# Altium PCB top.PcbDoc
Units mm, origin at the board's own origin, x right, y up, seen from the top; angles counter-clockwise.
Board outline 90.31 x 81.89 mm, 2 copper layers (Top Layer, Bottom Layer); 16 components, 7 nets, 117 pads, 6 vias.
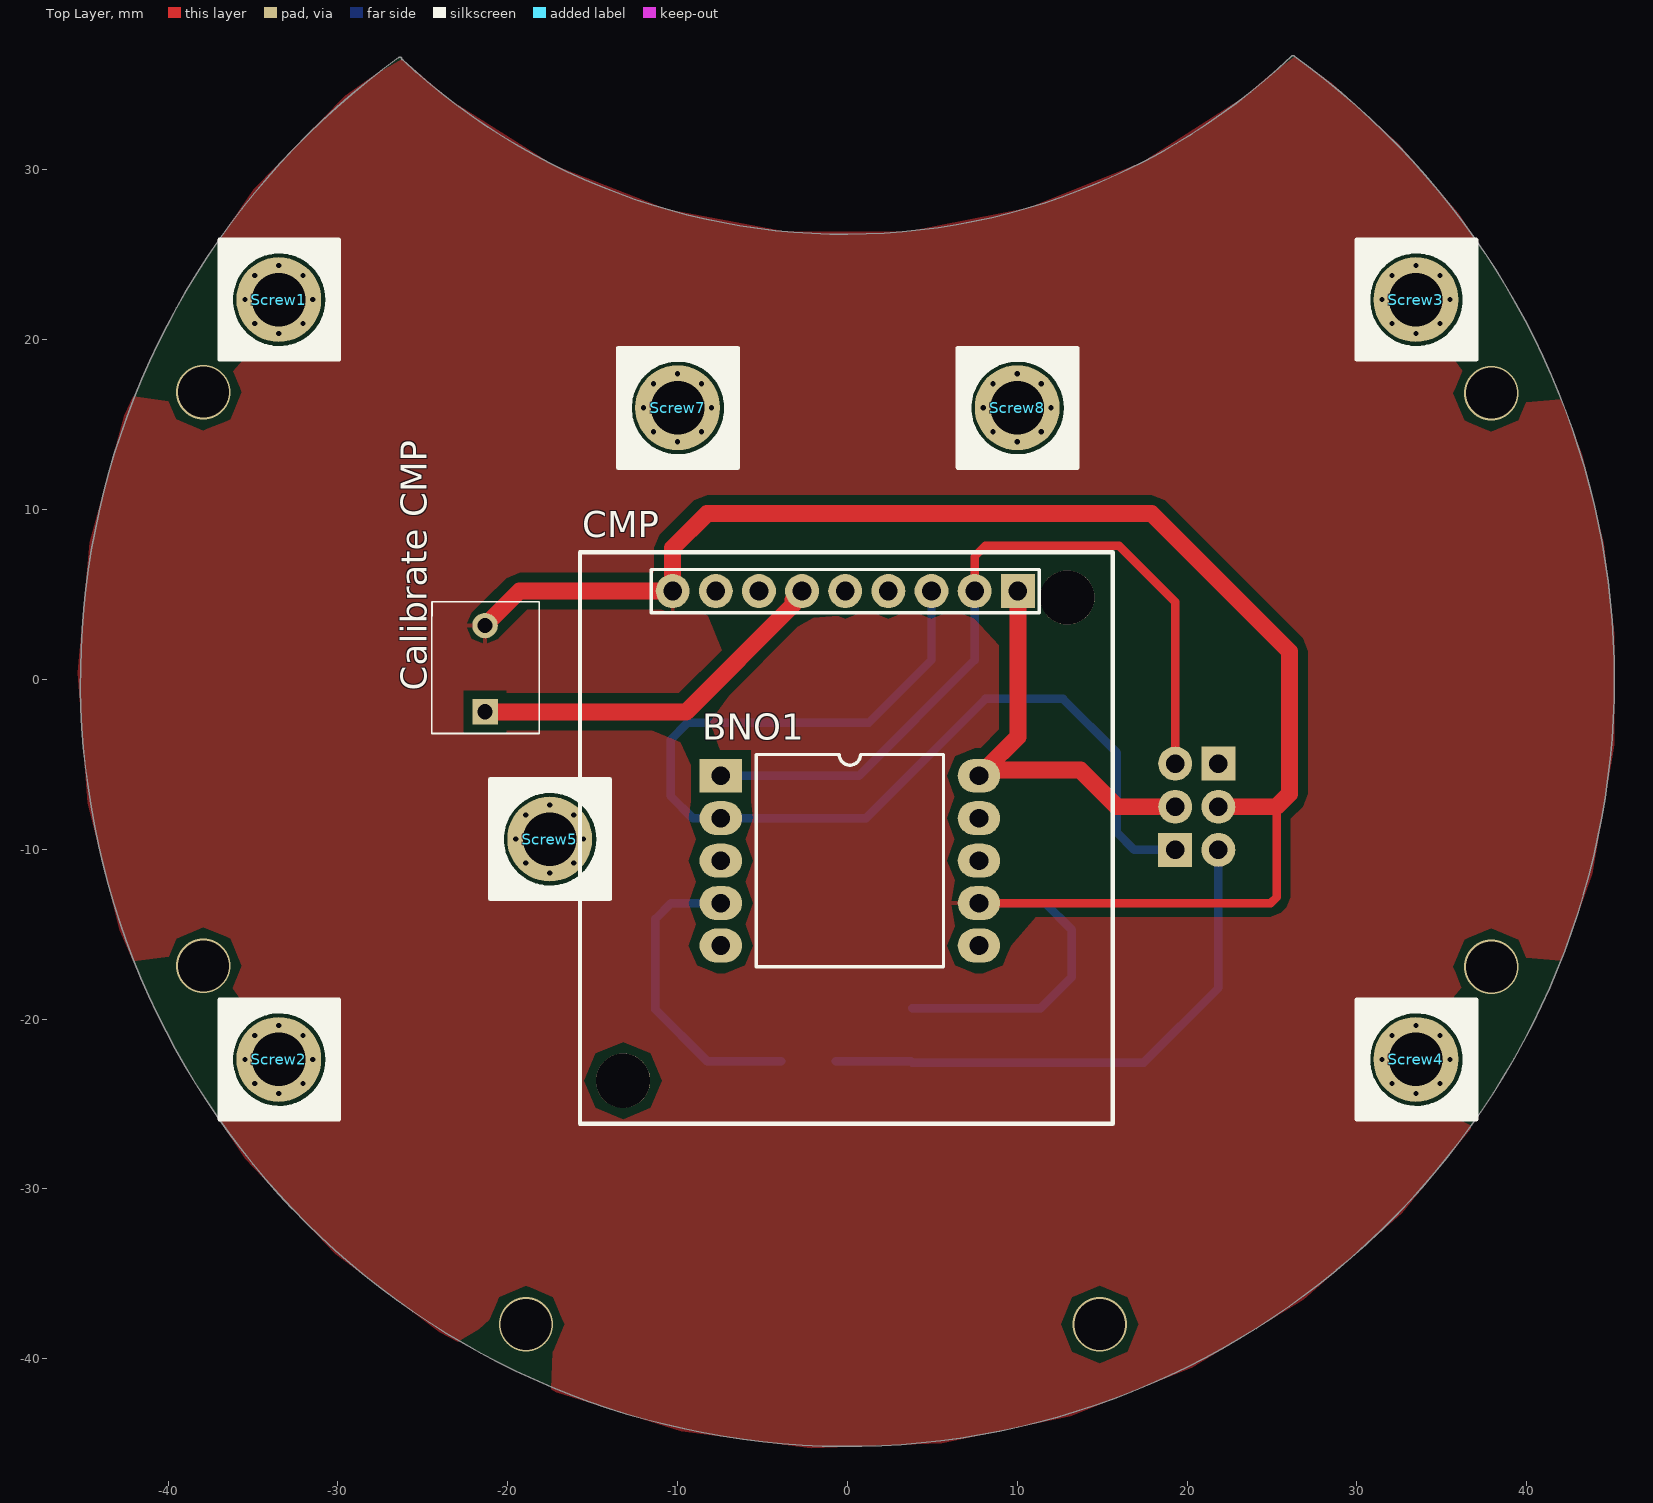
[diagram p0: Top Layer view]
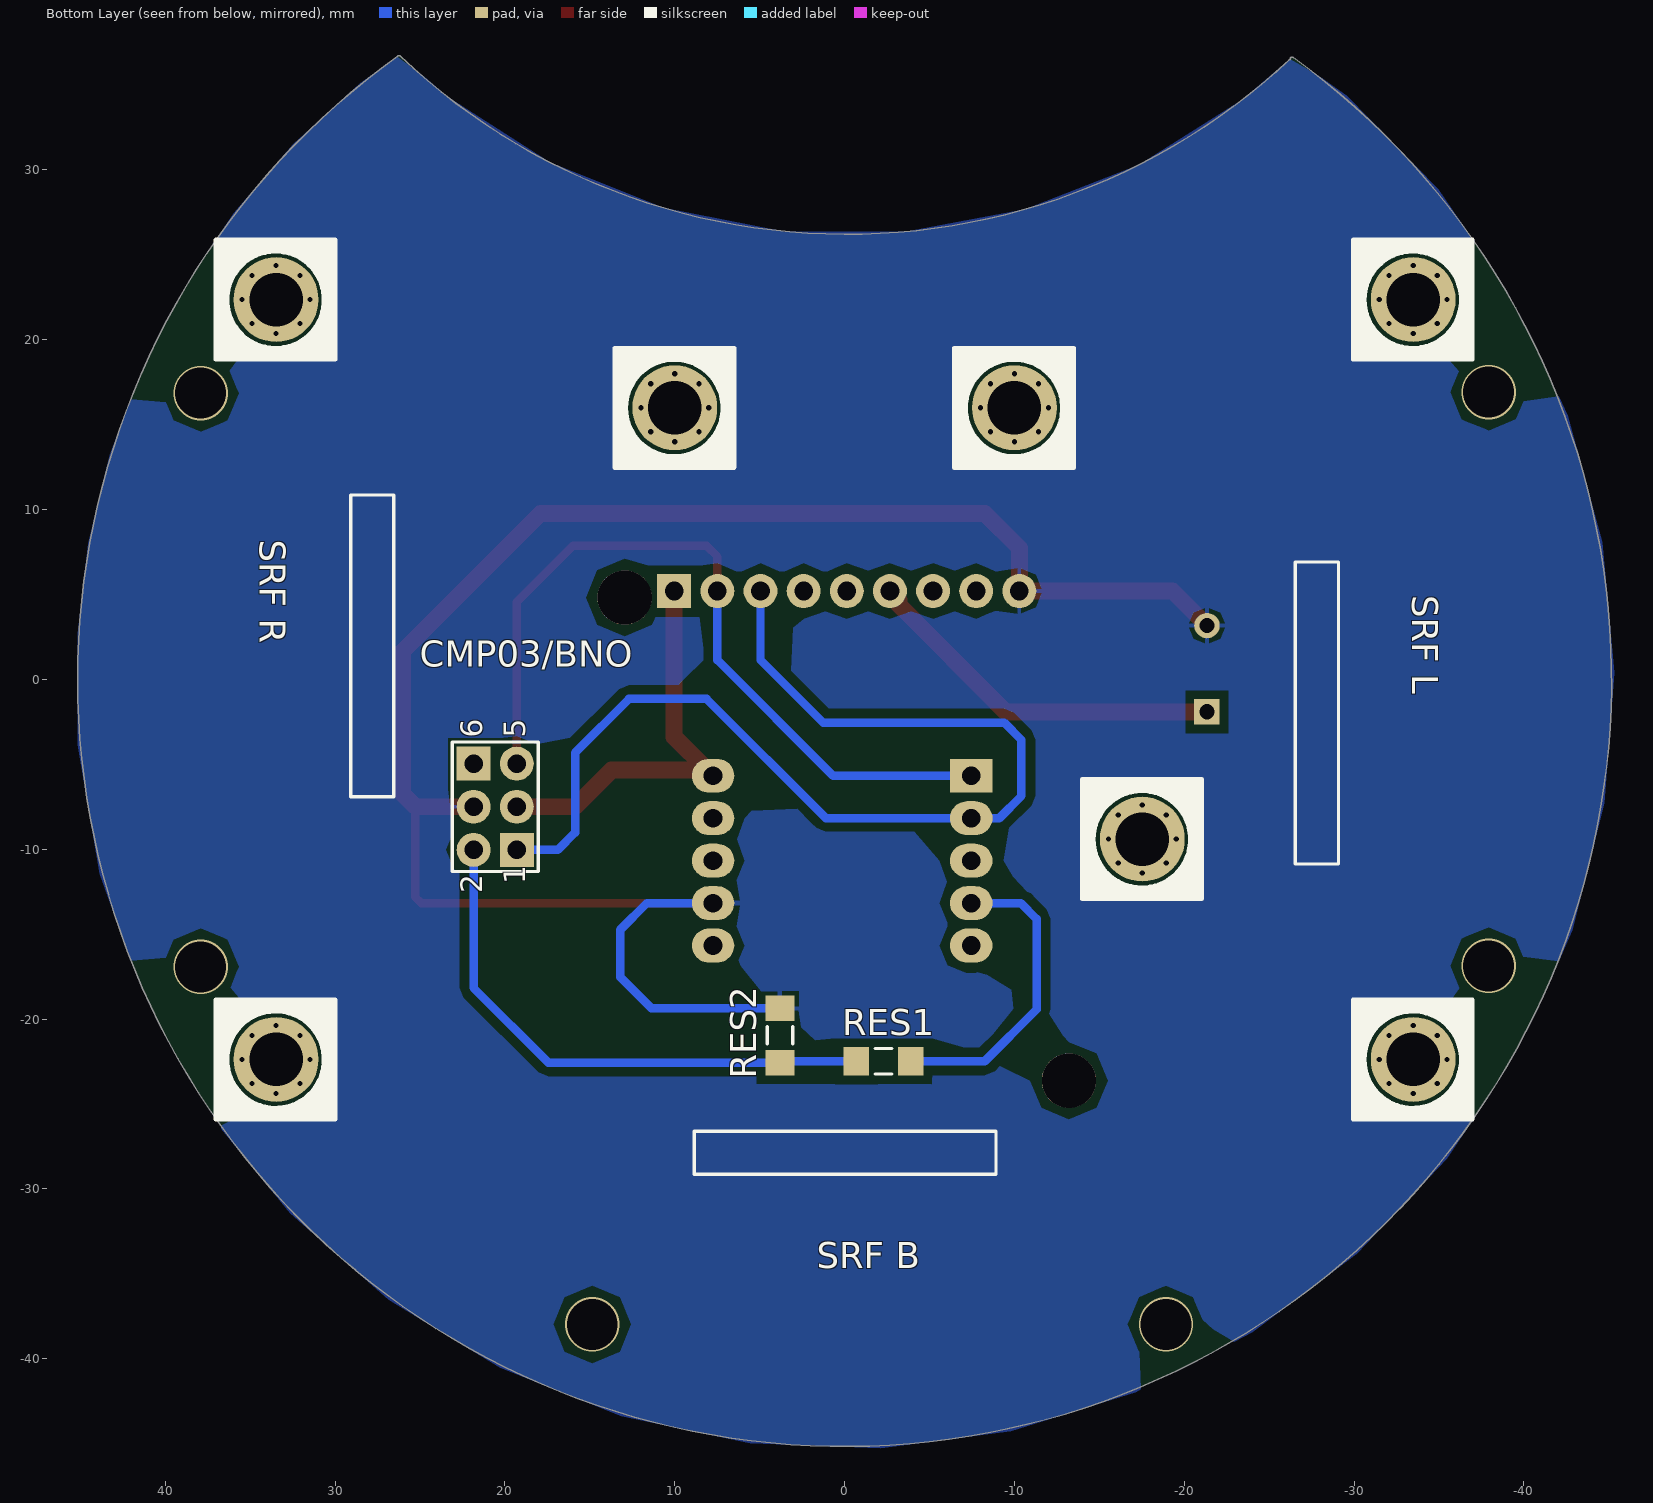
[diagram p1: Bottom Layer view, seen from below]

## Layer stack, top to bottom
Top Solder: solder mask 0.0102, Solder Resist, Dk 3.5
Top Layer: signal copper 0.0356
Dielectric 1: dielectric 0.32, FR-4, Dk 4.8
Bottom Layer: signal copper 0.0356
Bottom Solder: solder mask 0.0102, Solder Resist, Dk 3.5

## Board outline
-26.427,36.618 ccw(c0,0) 45.158,0 ccw(c0,0) 26.339,36.681 ccw(c26.238,36.603) 26.15,36.696 cw(c-0.127,64.389) -26.171,36.476 ccw(c-26.258,36.383) -26.226,36.506 ccw(c-26.353,36.514) -26.225,36.514 ccw(c-26.353,36.514)

## Design rules (kind name [scope] priority, off if disabled: settings)
Clearance [All] p1: gap=0.5 ignorepadtopadclearanceinfootprint=FALSE
HoleSize [All] p1: absolutevalues=TRUE maxlimit=4 minlimit=0.025 maxpercent=80.000 minpercent=20.000
PolygonConnect [All] p1: connectstyle=Relief reliefconductorwidth=0.254 reliefentries=4 polygonreliefangle="90 Angle" airgapwidth=0.254
RoutingVias [All] p1: holewidth=0.711 width=1.27 viastyle="Through Hole" minholewidth=0.711 minwidth=1.27 maxholewidth=0.711 maxwidth=1.27
SilkToSilkClearance [All] p1: silktosilkclearance=0.1
SilkToSolderMaskClearance [IsPad] p1: minsilkscreentomaskgap=0.1 clearancetoexposedcopper=TRUE
SolderMaskExpansion [All] p1: expansion=0.102
Width [All] p1: maxlimit=2 minlimit=0.254 preferedwidth=1 minimp=50.000000 maximp=50.000000 favimp=50.000000
27 further rules are at their usual default settings.

## Components (designator, comment, footprint, x,y, rotation, side; value= is the part's Value field where it differs from the comment)
BNO1 "Gy955" DIP10 -7.453,-5.668 r0 top
"Calibrate CMP" "Push Button" "Push Button" -21.336,0.635 r0 top
CMP "CMP03" CMP03 0.381,-10.033 r0 top (schematic designator CMP1)
CMP03/BNO "IDC 2X3" "IDC 2X3" 20.574,-7.493 r90 bottom (schematic designator CMP2)
RES1 "SMD" "Resistor SMD 1206" -2.286,-22.479 r180 bottom
RES2 "SMD" "Resistor SMD 1206" 3.81,-20.955 r270 bottom
Screw1 "Screw" Screw -33.479,22.37 r0 top
Screw2 "Screw" Screw -33.479,-22.37 r0 top
Screw3 "Screw" Screw 33.479,22.37 r0 top
Screw4 "Screw" Screw 33.479,-22.37 r0 top
Screw5 "Screw" Screw -17.526,-9.398 r0 top
Screw7 "Screw" Screw -10,16 r0 top
Screw8 "Screw" Screw 10,16 r0 top
"SRF B" "Ultrasonic" MaxSonar 0,-35.052 r90 bottom (schematic designator MaxSonar3)
"SRF L" "Ultrasonic" MaxSonar -35,-2 r0 bottom (schematic designator MaxSonar1)
"SRF R" "Ultrasonic" MaxSonar 35,2 r180 bottom (schematic designator MaxSonar2)

## Footprints (in the part's own frame and the unit in brackets; to place one, negate y for a bottom-side part, rotate by r counter-clockwise, add the part's x,y. Pads: shape width x height; smd on the part's side, far side on the other; paste and mask are expansions set on the pad)
CMP03 [mm]
  round 3.2 hole 3.2: 0(-13.589,-13.589) 0(12.573,14.859)
  rect 2x2 hole 1.1: 1(9.652,15.24)
  round 2 hole 1.1: 2(7.112,15.24) 3(4.572,15.24) 4(2.032,15.24) 5(-0.508,15.24) 6(-3.048,15.24) 7(-5.588,15.24) 8(-8.128,15.24) 9(-10.668,15.24)
  silkscreen extent -16.13,-16.13 15.24,17.53
DIP10 [mm]
  rect 2.5x2 hole 1.1: 1(0,0)
  oval 2.5x2 hole 1.1: 2(0,-2.5) 3(0,-5) 4(0,-7.5) 5(0,-10) 6(15.2,-10) 7(15.2,-7.5) 8(15.2,-5) 9(15.2,-2.5) 10(15.2,0)
  silkscreen extent 2.08,-11.25 13.12,1.25
"IDC 2X3" [mm]
  rect 2x2 hole 1.1: 1(-2.54,-1.27) 6(2.54,1.27)
  round 2 hole 1.1: 2(-2.54,1.27) 3(0,-1.27) 4(0,1.27) 5(2.54,-1.27)
  silkscreen extent -3.81,-2.54 3.81,2.54, body extent -7.62,-4.86 7.62,4.59, height 9.1
MaxSonar [mil] "HighPerformance UltraSonic Range Finder"
  rect 0x0 all layers, no hole: 1(283,299)
  round 0 all layers, no hole: 2(283,199) 3(283,99) 4(283,-1) 5(283,-101) 6(283,-201) 7(283,-301)
  silkscreen extent 233,-351 333,349, body extent -485,-924 297,768, height 846
"Push Button" [mm]
  rect 1.5x1.5 hole 0.9: 1(0,-2.54)
  round 1.5 hole 0.9: 2(0,2.54)
  silkscreen extent -3.13,-3.81 3.19,3.94
"Resistor SMD 1206" [mm]
  rect 1.5x1.7 smd: 1(-1.6,0) 2(1.6,0)
  silkscreen extent -0.5,-0.75 0.5,0.75, body extent -1.6,-0.8 1.6,0.8, height 0.55
Screw [mm]
  round 0.6 hole 0.3: S(-2,0) S(-1.414,-1.414) S(-1.414,1.414) S(0,-2) S(0,2) S(1.414,-1.414) S(1.414,1.414) S(2,0)
  round 5 hole 3.15 mask+0.1: S(0,0)
  silkscreen extent -3.49,-3.53 3.56,3.52, body extent -2.8,-2.8 2.8,2.8, height 3.88

## Part data
RES1 RES2: library part "Res SMD"
"SRF B" "SRF L" "SRF R": library part MaxSonar
Screw1 Screw2 Screw3 Screw4 Screw5 Screw7 Screw8: LatestRevisionDate=17-Jul-2002, LatestRevisionNote="Re-released for DXP Platform.", Publisher="Altium Limited"

## Via types
v1: diameter 3.2, hole 3, Top Layer to Bottom Layer, 6 vias

## Nets (pads, with @x,y where several pads share a name; then routed paths per layer and width w, separated by ;. In a path a pad name is that pad's centre, name@x,y a point inside that pad or via, vN(x,y) a via of type N, cw(c..) or ccw(c..) an arc to the next point about the centre after c; other vN are vias at no path point)
Calibrate: "Calibrate CMP.1" CMP.6 | length 21.8
  Top Layer w1: -21.336,-1.905 -9.491,-1.905 -3.207,4.379 -3.207,4.667 CMP.6
GND: "Calibrate CMP.2" BNO1.7 CMP03/BNO.4 CMP.9 RES2.1 | length 109.9
  Top Layer w0.5: BNO1.7 24.932,-13.168 25.273,-12.827 25.273,-7.493
  Top Layer w1: -21.336,3.175 -19.304,5.207 CMP.9 -10.287,7.747 -8.255,9.779 17.907,9.779 26.035,1.651 26.035,-6.731 25.273,-7.493 CMP03/BNO.4
  Bottom Layer w0.5: RES2.1 11.379,-19.355 13.208,-17.526 13.208,-14.732 11.644,-13.168 BNO1.7
NetCMP2_2: CMP03/BNO.2 RES1.1 RES2.2 | length 32.5
  Bottom Layer w0.5: RES1.1 3.734,-22.479 RES2.2 17.45,-22.555 21.844,-18.161 CMP03/BNO.2
"RESET BNO": BNO1.4 RES1.2 | length 18.2
  Bottom Layer w0.5: BNO1.4 -10.374,-13.168 -11.303,-14.097 -11.303,-19.431 -8.255,-22.479 RES1.2
SCL: BNO1.1 CMP03/BNO.5 CMP.2 | length 46.8
  Top Layer w0.5: CMP.2 7.493,7.239 8.128,7.874 16.002,7.874 19.304,4.572 CMP03/BNO.5
  Bottom Layer w0.5: BNO1.1 0.682,-5.668 7.493,1.143 CMP.2
SDA: BNO1.2 CMP03/BNO.1 CMP.3 | length 64.3
  Bottom Layer w0.5: CMP.3 4.953,1.143 1.27,-2.54 -9.398,-2.54 -10.414,-3.556 -10.414,-6.858 -9.104,-8.168 BNO1.2 1.103,-8.168 8.128,-1.143 12.7,-1.143 15.875,-4.318 15.875,-9.017 16.891,-10.033 CMP03/BNO.1
VCC: BNO1.10 CMP03/BNO.3 CMP.1 | length 23.9
  Top Layer w1: BNO1.10 BNO1.10@8.081,-5.334 ; CMP.1 10.033,-3.382 BNO1.10@8.081,-5.334 ; CMP03/BNO.3 15.875,-7.493 13.716,-5.334 BNO1.10@8.081,-5.334
pads on no net: "SRF B.1" "SRF B.2" "SRF B.3" "SRF B.4" "SRF B.5" "SRF B.6" "SRF B.7" "SRF L.1" "SRF L.2" "SRF L.3" "SRF L.4" "SRF L.5" "SRF L.6" "SRF L.7" "SRF R.1" "SRF R.2" "SRF R.3" "SRF R.4" "SRF R.5" "SRF R.6" "SRF R.7" BNO1.3 BNO1.5 BNO1.6 BNO1.8 BNO1.9 CMP03/BNO.6 CMP.0 CMP.4 CMP.5 CMP.7 CMP.8 Screw1.S Screw2.S Screw3.S Screw4.S Screw5.S Screw7.S Screw8.S
copper on no net:
  other v1: -18.923,-37.973 14.859,-37.973 37.921,-16.923 -37.921,-16.859 37.921,16.859 -37.921,16.923

## Polygon pours and split planes (outlines as drawn)
GND on Top Layer "GND_L01_P000" (solid, remove dead copper, pour order 0): -26.427,36.618 ccw(c0,0) 45.158,0 ccw(c0,0) 26.339,36.681 ccw(c26.238,36.603) 26.15,36.696 cw(c-0.127,64.389) -26.171,36.476 ccw(c-26.258,36.383) -26.226,36.506 ccw(c-26.353,36.514) -26.225,36.514 ccw(c-26.353,36.514)
GND on Bottom Layer "GND_L02_P001" (solid, remove dead copper, pour order 1): -26.427,36.618 ccw(c0,0) 45.158,0 ccw(c0,0) 26.339,36.681 ccw(c26.238,36.603) 26.15,36.696 cw(c-0.127,64.389) -26.171,36.476 ccw(c-26.258,36.383) -26.226,36.506 ccw(c-26.353,36.514) -26.225,36.514 ccw(c-26.353,36.514)

## Silkscreen, mask and mechanical layers (free items; w line width, h text height)
Mechanical 1:
  circle w0.013: c-33.479,-22.37 r1.5
  circle w0.013: c-33.479,22.37 r1.5
  circle w0.013: c33.479,22.37 r1.5
  circle w0.013: c33.479,-22.37 r1.5
  lines w0.254: -42.791,-13.926 ccw(c0,0) -15.103,-42.39 ; -26.353,36.514 ccw(c0,0) 26.258,36.583 ; -26.258,36.383 ccw(c-0.127,64.389) 26.238,36.603 ; 14.611,-42.562 ccw(c0,0) 42.779,-13.963 ; 26.216,36.575 cw(c0,0) 40.146,20.329

## Text inside footprints (layer, text, board x,y; h text height)
CMP03/BNO: Bottom Overlay "1" at 18.796,-12.065 h1.27 r270; Bottom Overlay "2" at 21.336,-12.573 h1.27 r270; Bottom Overlay "5" at 18.796,-3.429 h1.27 r270; Bottom Overlay "6" at 21.336,-3.429 h1.27 r270
"SRF B": Mechanical 1 "Gnd" at -10.541,-28.956 h0.5 r270
"SRF L": Mechanical 1 "Gnd" at -28.904,8.541 h0.5 r180
"SRF R": Mechanical 1 "Gnd" at 28.904,-8.541 h0.5